# Altium PCB MAGIsCM0Core.PcbDoc
Units mil, origin at the board's own origin, x right, y up, seen from the top; angles counter-clockwise.
Board outline 6000 x 4000 mil, 2 copper layers (Top Layer, Bottom Layer); 12 components, 22 nets, 93 pads, 13 vias.
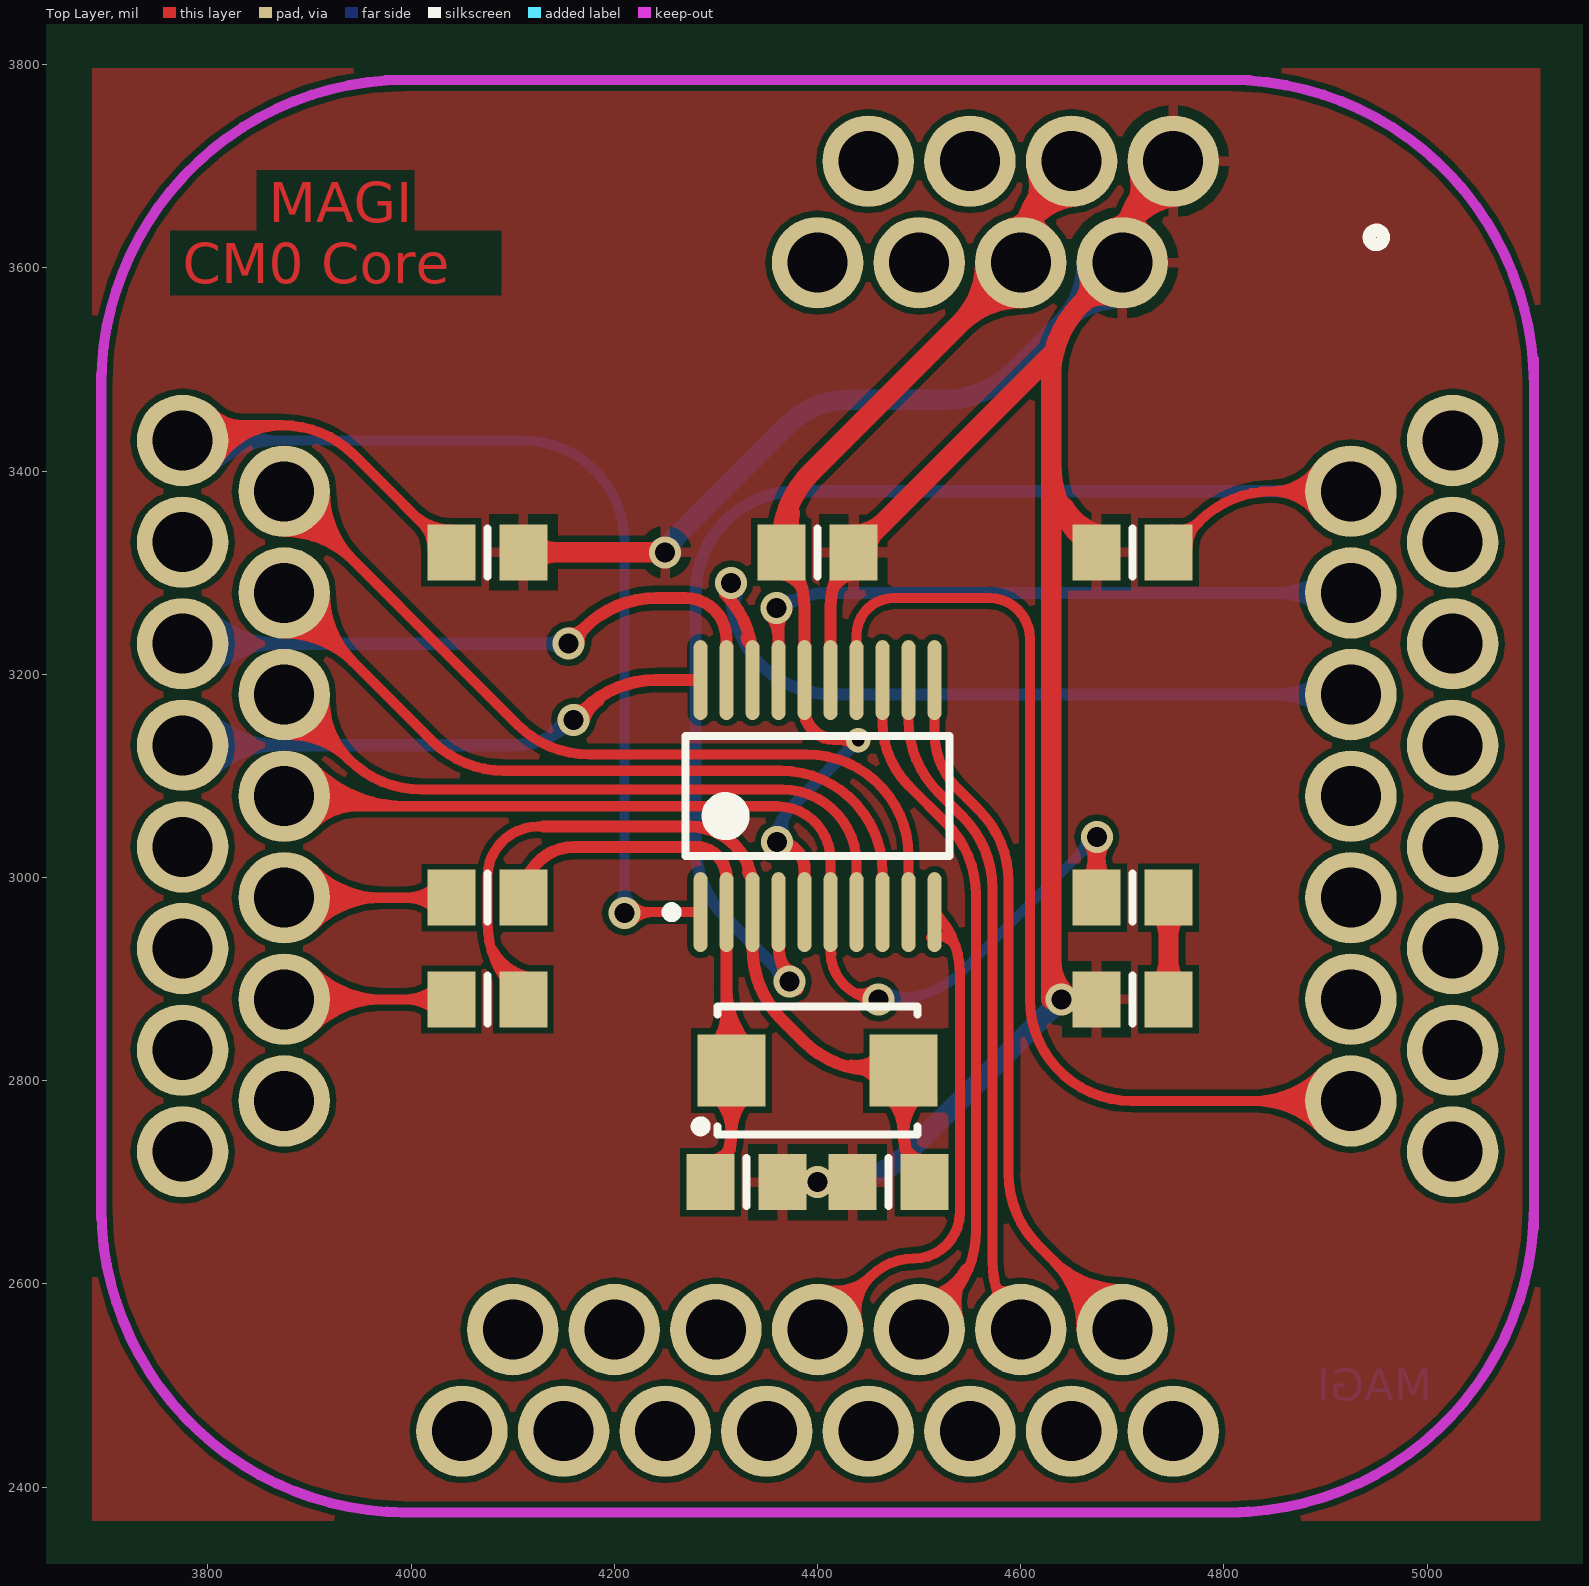
[diagram p0: Top Layer view]
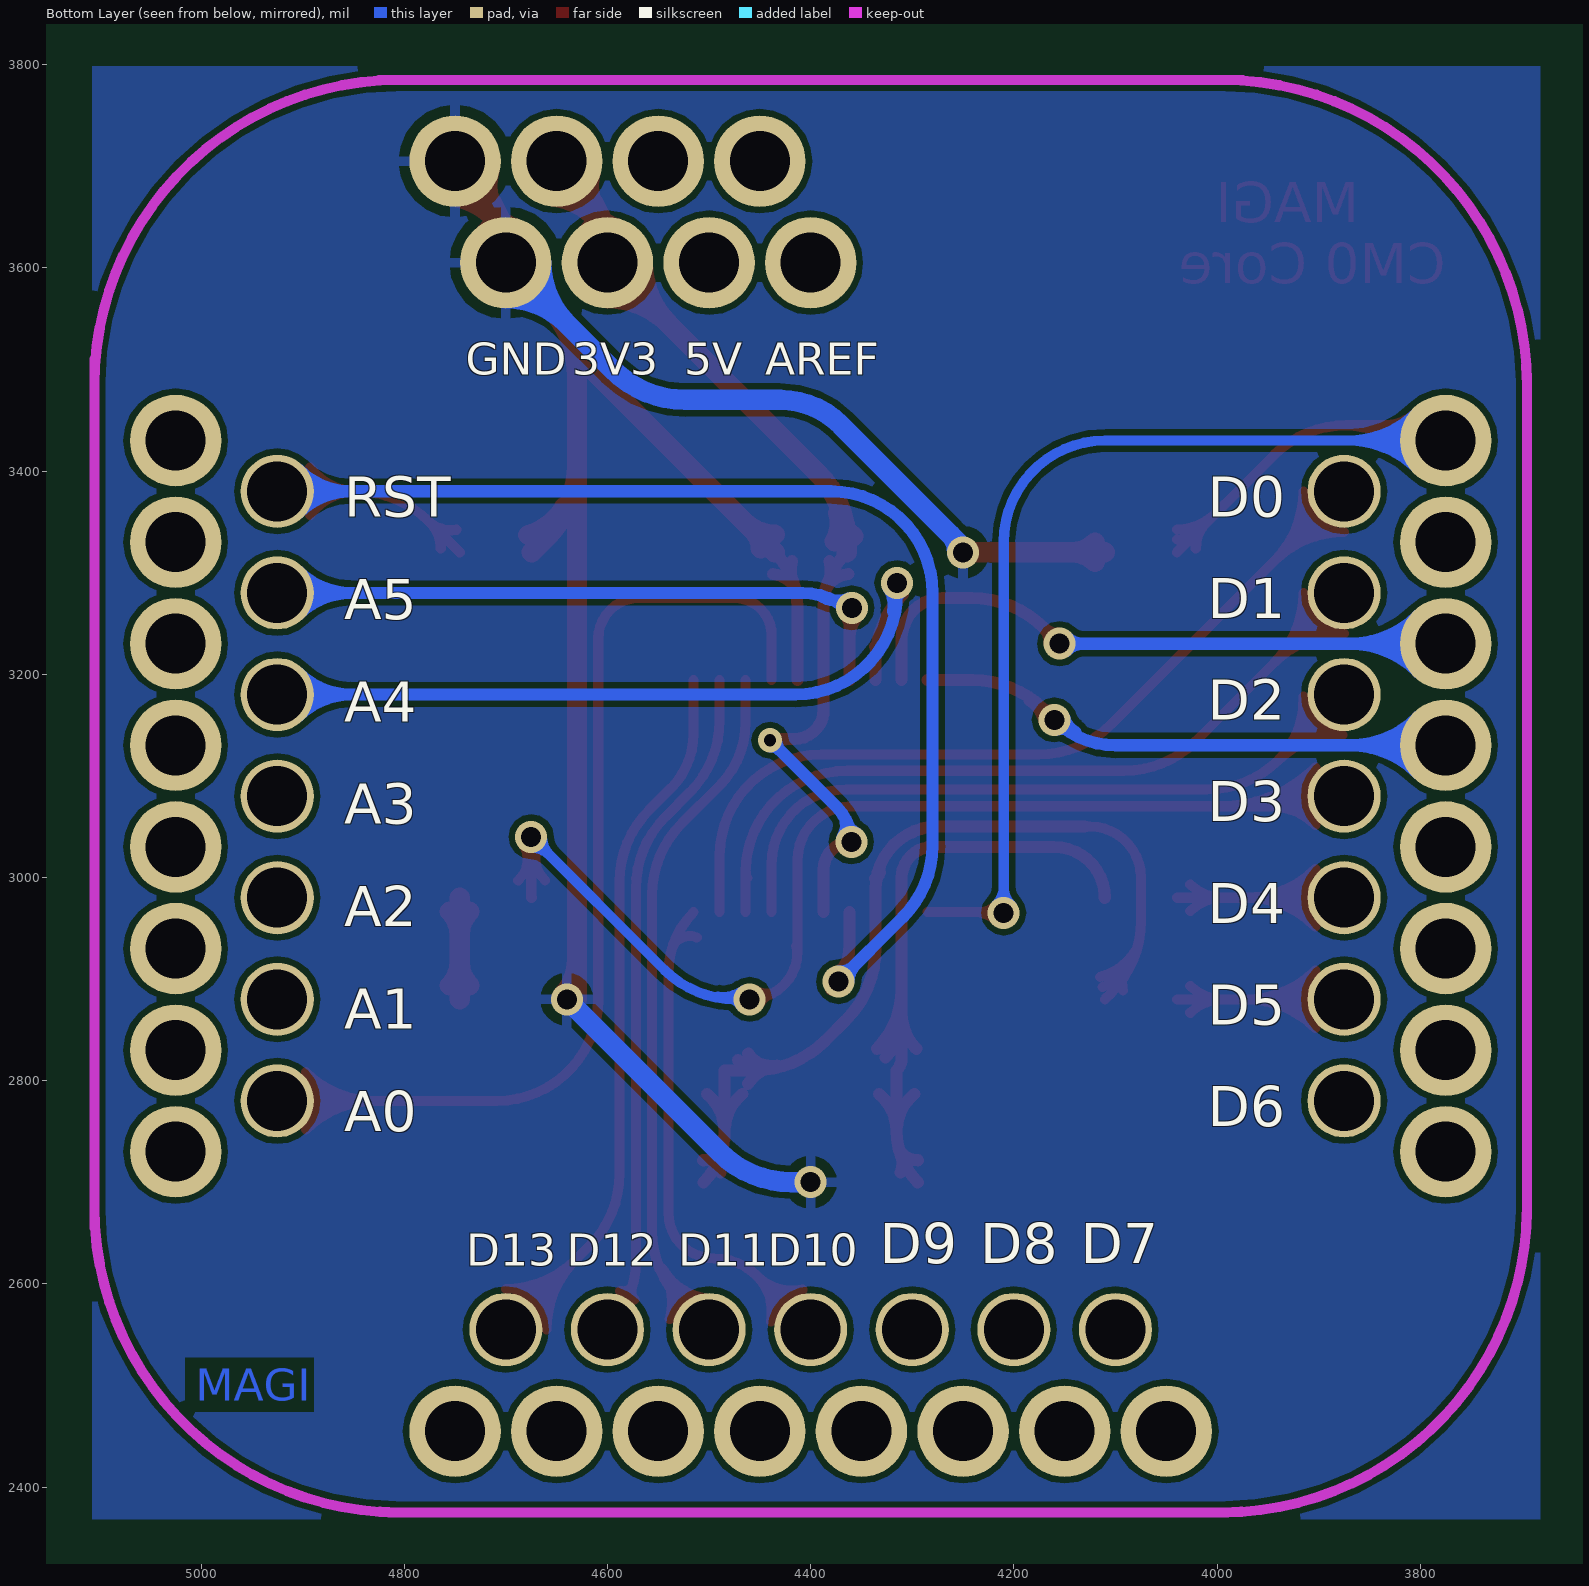
[diagram p1: Bottom Layer view, seen from below]

## Layer stack, top to bottom
Top Solder: solder mask 0.4, Solder Resist, Dk 3.5
Top Layer: signal copper 1.4
Dielectric 1: dielectric 12.6, FR-4, Dk 4.8
Bottom Layer: signal copper 1.4
Bottom Solder: solder mask 0.4, Solder Resist, Dk 3.5

## Board outline
1000,1000 7000,1000 7000,5000 1000,5000

## Design rules (kind name [scope] priority, off if disabled: settings)
Clearance [All] p1: gap=6
PolygonConnect [All] p1: connectstyle=Relief reliefconductorwidth=10 reliefentries=4 polygonreliefangle="90 Angle" airgapwidth=10
RoutingVias [All] p1: holewidth=28 width=50 viastyle="Through Hole" minholewidth=12 minwidth=24 maxholewidth=280 maxwidth=500
SolderMaskExpansion [All] p1: expansion=4
Width [All] p1: maxlimit=100 minlimit=10 preferedwidth=30
29 further rules are at their usual default settings.

## Classes and differential pairs
component class MAGI'sM0Core: C1 C2 C3 LED3 R1 R2 R8 U1 X1

## Components (designator, comment, footprint, x,y, rotation, side; value= is the part's Value field where it differs from the comment)
C1 "10uf" 6-0805_n 4400,3320 r0 top
C2 "15PF" 6-0805_n 4330,2700 r180 top
C3 "15PF" 6-0805_n 4470,2700 r0 top
C4 "100nF" 6-0805_n 4710,3320 r0 top
J1 "MAGIsBoard-2x" MAGIsBoard-2x 4400,3080 r0 top
LED3 "LED_3" 6-0805_N 4710,2880 r180 top
R1 "10K" 6-0805_n 4075,2980 r180 top
R2 "10K" 6-0805_n 4075,2880 r180 top
R3 "10K" 6-0805_n 4075,3320 r180 top
R8 "RES1_1" 6-0805_N 4710,2980 r180 top
U1 "STM32F030F4" STM32F030 4400,3080 r90 top
X1 "8M" 5032 4410,2810 r270 top

## Footprints (in the part's own frame and the unit in brackets; to place one, negate y for a bottom-side part, rotate by r counter-clockwise, add the part's x,y. Pads: shape width x height; smd on the part's side, far side on the other; paste and mask are expansions set on the pad)
6-0805_n [mm] "Chip Resistor, Body 2.0x1.2mm, IPC Medium Density"
  rect 1.2x1.4 smd: 1(-0.9,0) 2(0.9,0)
  silkscreen extent 0,-0.6 0,0.6, body extent -1.07,-0.7 1.07,0.7, height 0.7
6-0805_N [mm] "Chip Resistor, Body 2.0x1.2mm, IPC Medium Density"
  rect 1.2x1.4 smd: 1(-0.9,0) 2(0.9,0)
  silkscreen extent 0,-0.6 0,0.6, body extent -1.07,-0.7 1.07,0.7, height 0.7
5032 [mm]
  rect 1.8x1.7 smd: 1(0,-2.404) 2(0,1.896)
  silkscreen extent -1.6,-3.3 1.6,2.25
MAGIsBoard-2x [mil]
  round 90 hole 59.06: 1(300,525) 1(350,625) 2(200,525) 2(250,625) 3(100,525) 3(150,625) 4(0,525) 4(50,625) 29(-625,350) 30(-625,250) 31(-625,150) 32(-625,50) 33(-625,-50) 34(-625,-150) 35(-625,-250) 36(-625,-350) 37(-350,-625) 38(-250,-625) 39(-150,-625) 40(-50,-625) 41(50,-625) 42(150,-625) 43(250,-625) 44(350,-625) 45(625,-350) 46(625,-250) 47(625,-150) 48(625,-50) 49(625,50) 50(625,150) 51(625,250) 52(625,350)
  round 90 / inner round 90 / far side round 72 hole 59.06: 8(-525,300) 9(-525,200) 10(-525,100) 11(-525,0) 12(-525,-100) 13(-525,-200) 14(-525,-300) 15(-300,-525) 16(-200,-525) 17(-100,-525) 18(0,-525) 19(100,-525) 20(200,-525) 21(300,-525) 22(525,-300) 23(525,-200) 24(525,-100) 25(525,0) 26(525,100) 27(525,200) 28(525,300)
  Keep-Out Layer lines w10: -705,-415 -705,415 ; -705,-405 ccw(c-405,-405) -405,-705 ; -705,405 cw(c-405,405) -405,705 ; -425,705 425,705 ; -410,-705 415,-705 ; 405,-705 ccw(c405,-405) 705,-405 ; 405,705 cw(c405,405) 705,405 ; 705,-425 705,430
  silkscreen extent 543,543 557,557
STM32F030 [mm] "TSOP, 20-Leads, Body 6.50x4.40mm, Pitch 0.65mm, IPC Low Density"
  oval 2x0.35 smd: 1(-2.9,2.925) 2(-2.9,2.275) 3(-2.9,1.625) 4(-2.9,0.975) 5(-2.9,0.325) 6(-2.9,-0.325) 7(-2.9,-0.975) 8(-2.9,-1.625) 9(-2.9,-2.275) 10(-2.9,-2.925) 11(2.9,-2.925) 12(2.9,-2.275) 13(2.9,-1.625) 14(2.9,-0.975) 15(2.9,-0.325) 16(2.9,0.325) 17(2.9,0.975) 18(2.9,1.625) 19(2.9,2.275) 20(2.9,2.925)
  silkscreen extent -3.02,-3.3 1.5,3.77, body extent -2.25,-3.3 2.25,3.3, height 1.2

## Part data
C1: library part "CAPACITOR POL", "Capacitor"
C2 C3 C4: library part CAP
R1 R2 R3: library part RES
X1: library part CRYSTAL

## Via types
v1: diameter 31.5, hole 19.68, Top Layer to Bottom Layer, 12 vias
v2: diameter 24, hole 12, Top Layer to Bottom Layer, 1 vias

## Nets (pads, with @x,y where several pads share a name; then routed paths per layer and width w, separated by ;. In a path a pad name is that pad's centre, name@x,y a point inside that pad or via, vN(x,y) a via of type N, cw(c..) or ccw(c..) an arc to the next point about the centre after c; other vN are vias at no path point)
3.3V: C1.1 J1.2 U1.5 U1.16 | length 1466.8
  Top Layer w12: v1(4360,3035) cw(c4360,3007.8) 4387.2,3007.8 U1.5 ; C1.1@4362.99,3298.51 cw(c4360.45,3270.11) 4385.14,3284.37 cw(c4416.04,3302.21) C1.1@4381.58,3311.48 ; C1.1 cw(c4309.91,3265.35) 4387.2,3265.35 U1.16 4387.2,3165.1 ccw(c4416,3165.1) 4416,3136.31 4438.69,3136.31 cw(c4438.69,3135) v2(4440,3135) ; 4422.36,3136.31 cw(c4422.36,3117.36) v2@4435.76,3130.76
  Top Layer w20: C1.1@4357.76,3335.73 ccw(c4343.17,3360.99) 4371.35,3353.44 ; C1.1 4364.57,3328.15 cw(c4464.57,3328.15) 4393.86,3398.86 4600,3605 4600,3613.58 cw(c4700,3613.58) 4629.29,3684.29 J1.2@4650,3705 ; 4372.71,3358.52 ccw(c4408.07,3349.05) C1.1@4376.36,3330.75 ; J1.2@4565,3605 cw(c4480.5,3605) 4540.25,3545.25 cw(c4600,3485.5) J1.2@4600,3570 ; J1.2@4591.24,3638.89 ccw(c4583.84,3667.52) 4612.4,3659.86 ccw(c4637.56,3653.12) J1.2@4621.53,3632.59 ; J1.2@4601.22,3635.67 cw(c4661.83,3600.68) J1.2@4653.95,3670.22 ; 4610.34,3651.46 ccw(c4559.57,3680.77) J1.2@4616.19,3695.94 ; 4621.05,3670.02 cw(c4656.28,3649.68) J1.2@4651.69,3690.1
  Bottom Layer w12: v1@4355.13,3043.44 ccw(c4343.36,3063.82) 4366.09,3057.73 ccw(c4388.82,3051.64) v1@4368.44,3039.87 ; v1(4360,3035) cw(c4408.28,3035) 4374.14,3069.14 v2(4440,3135) ; v2@4434,3135 cw(c4419.51,3135) 4429.76,3124.76 cw(c4440,3114.51) v2@4440,3129
A0: J1.22 U1.14 | length 1327.9
  Top Layer w10: U1.14 4438.39,3238.39 cw(c4475,3238.39) 4475,3275 4569,3275 cw(c4569,3235) 4609,3235 4609,2880 ccw(c4709,2880) 4709,2780 J1.22 ; J1.22@4896.72,2751.72 ccw(c4828.43,2683.43) 4828.43,2780 ccw(c4828.43,2876.57) J1.22@4896.72,2808.28 ; J1.22@4903.79,2758.79 ccw(c4852.57,2707.57) 4852.57,2780 ccw(c4852.57,2852.43) J1.22@4903.79,2801.21 ; J1.22@4910.86,2765.86 ccw(c4876.72,2731.72) 4876.72,2780 ccw(c4876.72,2828.28) J1.22@4910.86,2794.14
A4: J1.26 U1.18 | length 998.8
  Top Layer w12: v1@4308.96,3278.96 cw(c4243.62,3213.62) 4336.02,3213.62 U1.18 ; 4330.1,3235.72 ccw(c4343.3,3239.26) U1.18@4336.47,3227.42
  Bottom Layer w12: v1@4309.7,3281.82 cw(c4300.77,3268.05) 4316.82,3271.48 ; v1(4315,3290) 4315,3280 ccw(c4415,3280) 4415,3180 J1.26 ; 4318.92,3261.62 cw(c4348.91,3268.02) v1@4323.18,3284.7 ; J1.26@4903.79,3158.79 ccw(c4852.57,3107.57) 4852.57,3180 ccw(c4852.57,3252.43) J1.26@4903.79,3201.21 ; J1.26@4912.27,3167.27 ccw(c4881.54,3136.54) 4881.54,3180 ccw(c4881.54,3223.46) J1.26@4912.27,3192.73
A5: J1.27 U1.17 | length 893.6
  Top Layer w12: v1@4352.51,3258.46 cw(c4330.55,3236.49) 4361.61,3236.49 ; v1(4359.41,3265.35) 4359.65,3265.35 4360,3265 4360,3260 cw(c4360,3258.39) 4361.61,3258.39 U1.17 ; 4361.61,3247.14 cw(c4377.61,3247.14) v1@4366.3,3258.46
  Bottom Layer w12: v1(4359.41,3265.35) 4359.65,3265.35 4360,3265 4360,3260 cw(c4408.28,3211.72) 4408.28,3280 J1.27 ; v1@4363,3274.41 ccw(c4373.67,3301.32) 4388.15,3276.25 ; J1.27@4903.79,3258.79 ccw(c4852.57,3207.57) 4852.57,3280 ccw(c4852.57,3352.43) J1.27@4903.79,3301.21 ; J1.27@4912.27,3267.27 ccw(c4881.54,3236.54) 4881.54,3280 ccw(c4881.54,3323.46) J1.27@4912.27,3292.73
BOOT0: J1.29 R3.2 U1.1 | length 2041.1
  Top Layer w10: J1.29 cw(c3811.21,3393.79) 3811.21,3445 3873.15,3445 ; J1.29@3783.53,3424.78 cw(c3819.61,3402.7) 3819.61,3445 ; J1.29@3792.06,3419.56 cw(c3837.45,3391.78) 3837.45,3445 ; J1.29@3800.59,3414.34 cw(c3855.3,3380.86) 3855.3,3445 ; J1.29@3803.28,3458.28 ccw(c3835.36,3490.36) 3835.36,3445 ; J1.29@3809.12,3409.12 cw(c3873.14,3369.94) 3873.14,3445 ; 4001.06,3358.51 ccw(c4039.57,3397.02) R3.2@4039.57,3342.56 ; 4010.56,3349.01 cw(c3985.49,3323.94) R3.2@4020.94,3323.94 ; R3.2@4018.13,3341.44 ccw(c4039.57,3362.88) R3.2@4039.57,3332.56 ; R3.2 3943.86,3415.71 ccw(c3873.15,3345) 3873.15,3445 ; v1(4210,2965) cw(c4210.83,2965) 4210.83,2965.83 U1.1 ; v1@4217.6,2957.4 cw(c4237.94,2937.06) 4237.94,2965.83 ; v1@4217.6,2972.6 ccw(c4233.95,2988.95) 4233.95,2965.83
  Bottom Layer w10: J1.29 4110,3430 cw(c4110,3330) 4210,3330 v1(4210,2965) ; J1.29@3789.14,3415.86 cw(c3823.28,3381.72) 3823.28,3430 cw(c3823.28,3478.28) J1.29@3789.14,3444.14 ; J1.29@3796.21,3408.79 cw(c3847.43,3357.57) 3847.43,3430 cw(c3847.43,3502.43) J1.29@3796.21,3451.21 ; J1.29@3803.28,3401.72 cw(c3871.57,3333.43) 3871.57,3430 cw(c3871.57,3526.57) J1.29@3803.28,3458.28 ; v1@4202.4,2972.6 ccw(c4184.05,2990.95) 4210,2990.95 ccw(c4235.95,2990.95) v1@4217.6,2972.6
D0: J1.8 U1.9 | length 1171.1
  Top Layer w10: J1.8@3875,3340 cw(c3875,3243.43) 3943.28,3311.72 cw(c4011.57,3380) J1.8@3915,3380 ; J1.8@3875,3350 cw(c3875,3277.57) 3926.21,3328.79 cw(c3977.43,3380) J1.8@3905,3380 ; J1.8@3875,3360 cw(c3875,3311.72) 3909.14,3345.86 cw(c3943.28,3380) J1.8@3895,3380 ; J1.8 4104.71,3150.29 ccw(c4175.42,3221) 4175.42,3121 4389.57,3121 cw(c4389.57,3021) 4489.57,3021 U1.9
D1: J1.9 U1.8 | length 1101
  Top Layer w10: J1.9@3875,3240 cw(c3875,3143.43) 3943.28,3211.72 cw(c4011.57,3280) J1.9@3915,3280 ; J1.9@3875,3250 cw(c3875,3177.57) 3926.21,3228.79 cw(c3977.43,3280) J1.9@3905,3280 ; J1.9@3875,3260 cw(c3875,3211.72) 3909.14,3245.86 cw(c3943.28,3280) J1.9@3895,3280 ; J1.9 4020.71,3134.29 ccw(c4091.42,3205) 4091.42,3105 4363.98,3105 cw(c4363.98,3005) 4463.98,3005 U1.8 ; U1.8@4462.45,2999.43 ccw(c4456,3004.17) 4463.92,3005.38
D2: J1.10 U1.7 | length 996.5
  Top Layer w10: J1.10 3939.12,3115.88 ; J1.10@3875.91,3160.02 cw(c3877.8,3118.68) 3907.06,3147.94 cw(c3936.32,3177.2) J1.10@3894.98,3179.09 ; J1.10@3876.37,3150.03 cw(c3879.19,3088.02) 3923.09,3131.91 cw(c3966.98,3175.81) J1.10@3904.97,3178.63 ; J1.10@3876.82,3140.04 cw(c3880.59,3057.36) 3939.11,3115.89 ; J1.10@3914.96,3178.18 ccw(c3997.64,3174.41) 3939.11,3115.89 ; U1.7 4438.39,3013.21 ccw(c4365,3013.21) 4365,3086.59 4009.83,3086.59 cw(c4009.83,3186.59) 3939.12,3115.88
D3: J1.11 R8.2 U1.6 | length 1761.7
  Top Layer w10: J1.11 ccw(c3885,3080) 3885,3070 4360,3070 cw(c4360,3017.2) 4412.8,3017.2 U1.6 4412.8,2927.2 ccw(c4460,2927.2) v1(4460,2880) ; J1.11@3882.07,3087.07 ccw(c3923.28,3128.28) 3923.28,3070 ccw(c3923.28,3031.72) J1.11@3896.21,3058.79 ; J1.11@3889.14,3094.14 ccw(c3947.43,3152.43) 3947.43,3070 ccw(c3947.43,3007.57) J1.11@3903.28,3051.72 ; J1.11@3896.21,3101.21 ccw(c3971.57,3176.57) 3971.57,3070 ; J1.11@3903.28,3108.28 ccw(c3995.71,3200.71) 3995.71,3070 ; 4413.43,2924.82 cw(c4423.08,2927.41) U1.6@4414.43,2932.4 ; v1@4450.47,2875.04 ccw(c4430.6,2864.69) 4436.4,2886.32 ccw(c4442.2,2907.96) v1@4454.23,2889.07 ; R8.2@4661.4,2997.1 ccw(c4628.56,3029.94) v1@4675,3029.94 ; v1@4666.1,3033.98 cw(c4642.95,3018.31) 4669.95,3011.08 ; v1@4667.4,3032.4 cw(c4649.05,3014.05) 4675,3014.05 cw(c4700.95,3014.05) v1@4682.6,3032.4 ; v1@4669.63,3030.69 cw(c4662.02,3017.52) 4676.71,3021.46 ; 4672.43,3020.33 cw(c4688.9,3015.92) v1@4680.37,3030.69 ; R8.2 4675,2980 v1(4675,3040) ; v1@4675,3027.85 ccw(c4718.48,3027.85) R8.2@4687.73,2997.1 ; 4679.41,3011.37 cw(c4704.57,3018.11) v1@4683.64,3033.6
  Bottom Layer w10: v1(4460,2880) 4473.58,2880 ccw(c4473.58,2980) 4544.29,2909.29 v1(4675,3040) ; v1@4466.28,2888.72 ccw(c4485.79,2915.84) 4491.17,2882.87 ; v1@4468.72,2873.72 cw(c4483.73,2862.92) 4480.76,2881.17 ; v1@4664.25,3040 cw(c4638.3,3040) 4656.65,3021.65 cw(c4675,3003.3) v1@4675,3029.25
D4: J1.12 R1.2 | length 576.5
  Top Layer w10: J1.12 R1.2 ; J1.12@3889.14,2965.86 cw(c3923.28,2931.72) 3923.28,2980 cw(c3923.28,3028.28) J1.12@3889.14,2994.14 ; J1.12@3896.21,2958.79 cw(c3947.43,2907.57) 3947.43,2980 cw(c3947.43,3052.43) J1.12@3896.21,3001.21 ; J1.12@3903.28,2951.72 cw(c3971.57,2883.43) 3971.57,2980 cw(c3971.57,3076.57) J1.12@3903.28,3008.28 ; R1.2@4026.4,2966.83 ccw(c3994.61,2935.04) 3994.61,2980 ccw(c3994.61,3024.96) R1.2@4026.4,2993.17
D5: J1.13 R2.2 | length 576.5
  Top Layer w10: J1.13 R2.2 ; J1.13@3889.14,2865.86 cw(c3923.28,2831.72) 3923.28,2880 cw(c3923.28,2928.28) J1.13@3889.14,2894.14 ; J1.13@3896.21,2858.79 cw(c3947.43,2807.57) 3947.43,2880 cw(c3947.43,2952.43) J1.13@3896.21,2901.21 ; J1.13@3903.28,2851.72 cw(c3971.57,2783.43) 3971.57,2880 cw(c3971.57,2976.57) J1.13@3903.28,2908.28 ; R2.2@4026.4,2866.83 ccw(c3994.61,2835.04) 3994.61,2880 ccw(c3994.61,2924.96) R2.2@4026.4,2893.17
GND: C1.2 C2.1 C3.1 C4.1 J1.1 LED3.2 R3.1 U1.15 | length 3061.7
  Top Layer w12: U1.15 4412.8,3265.35 cw(c4490.09,3265.35) C1.2 ; C1.2@4418.42,3311.48 cw(c4383.96,3302.21) 4414.86,3284.37 cw(c4439.55,3270.11) C1.2@4437.01,3298.51
  Top Layer w20: R3.1 v1(4250,3320) ; R3.1@4120.07,3310.37 cw(c4143.32,3287.11) 4143.32,3320 cw(c4143.32,3352.89) R3.1@4120.07,3329.63 ; C1.2 4632.89,3517.46 ; C1.2@4435.43,3337.56 ccw(c4435.43,3379.95) 4465.41,3349.98 ; C1.2@4449.06,3323.94 cw(c4472.44,3323.94) C1.2@4455.9,3340.47 ; v1@4630,2880 4630,3405.99 ; 4630,2918.02 ccw(c4678.02,2918.02) v1@4644.06,2884.06 ; 4642.45,3364.44 ccw(c4693.29,3393.79) C4.1@4678.09,3337.09 ; J1.1@4666.64,3594.42 cw(c4638.18,3585.4) 4659.29,3564.29 ; C4.1 4659.29,3335.28 cw(c4730,3405.99) 4630,3405.99 ; J1.1@4689.42,3571.64 ccw(c4680.4,3543.18) 4659.29,3564.29 ; J1.1@4691.24,3638.89 ccw(c4683.84,3667.52) 4712.4,3659.86 ccw(c4737.56,3653.12) J1.1@4721.53,3632.59 ; J1.1@4701.22,3635.67 cw(c4761.83,3600.68) J1.1@4753.95,3670.22 ; 4710.34,3651.46 ccw(c4659.57,3680.77) J1.1@4716.19,3695.94 ; 4721.05,3670.02 cw(c4756.28,3649.68) J1.1@4751.69,3690.1 ; J1.1@4750,3705 4729.29,3684.29 ccw(c4800,3613.58) 4700,3613.58 4700,3605 4659.29,3564.29 ; 4630,3405.99 4630,3493.58 cw(c4730,3493.58) 4632.89,3517.46 ; 4632.89,3517.46 cw(c4730,3493.58) 4659.29,3564.29
  Bottom Layer w20: v1(4250,3320) cw(c4262.07,3320) 4253.54,3328.54 4370.25,3445.25 cw(c4430,3385.5) 4430,3470 4523.58,3470 ccw(c4523.58,3570) 4594.29,3499.29 J1.1@4700,3605 ; v1@4255.75,3320 cw(c4281.7,3320) 4263.35,3338.35 ; v1(4400,2700) 4418.58,2700 ccw(c4418.58,2800) 4489.29,2729.29 v1(4640,2880) ; J1.1@4665,3605 cw(c4580.5,3605) 4640.25,3545.25 cw(c4700,3485.5) J1.1@4700,3570
MISO: J1.20 U1.12 | length 700.8
  Top Layer w10: U1.12 4489.57,3154.48 ccw(c4589.57,3154.48) 4518.86,3083.77 4542.77,3059.86 cw(c4472.06,2989.15) 4572.06,2989.15 4572.06,2622.46 ccw(c4667.46,2622.46) J1.20 ; J1.20@4573.24,2584.73 ccw(c4566.22,2592.53) 4575.31,2597.77 ccw(c4584.39,2603.01) J1.20@4587.63,2593.04
MOSI: J1.19 U1.13 | length 874.3
  Top Layer w10: U1.13 4463.98,3152.83 ccw(c4552.83,3152.83) 4490,3090 4526.77,3053.23 cw(c4456.06,2982.52) 4556.06,2982.52 4556.06,2652.48 cw(c4456.06,2652.48) 4526.77,2581.77 J1.19 ; J1.19@4497.82,2584.92 ccw(c4493.41,2645.53) 4546.04,2615.15 ; J1.19@4498.55,2574.95 ccw(c4495.07,2622.78) 4536.6,2598.8 ; J1.19@4528.98,2562.76 cw(c4566.63,2572.85) 4532.87,2592.34 ; J1.19@4538.64,2565.35 cw(c4599.61,2581.69) 4544.94,2613.25
NetLED3_1: LED3.1 R8.1 | length 203.3
  Top Layer w20: LED3.1@4735.8,2893.57 ccw(c4712.55,2916.82) 4745.43,2916.82 ccw(c4778.32,2916.82) LED3.1@4755.07,2893.57 ; R8.1@4735.8,2966.43 cw(c4712.55,2943.18) 4745.43,2943.18 cw(c4778.32,2943.18) R8.1@4755.07,2966.43 ; LED3.1 R8.1
OSC_IN: C2.2 R1.1 U1.2 X1.1 | length 829.9
  Top Layer w12: R1.1 cw(c4160.43,2980) 4160.43,3030 4280,3030 cw(c4280,2999.57) 4310.43,2999.57 U1.2 4310.43,2821.88 ccw(c4327.23,2821.88) X1.1 4315.35,2750.18 ; C2.2@4294.33,2721.56 ccw(c4294.03,2744.04) 4313.5,2732.8 ccw(c4337.88,2718.73) C2.2@4311.24,2709.63 ; C2.2 ccw(c4244.38,2750.18) 4315.35,2750.18 ; X1.1@4295.93,2831.39 ccw(c4260.93,2866.39) 4310.43,2866.39 ; X1.1@4297.99,2786.75 cw(c4268.17,2750.19) 4315.35,2750.19 ; 4310.43,2861.18 ccw(c4364.57,2861.18) X1.1@4326.29,2822.9 ; 4310.43,2890.15 ccw(c4393.54,2890.15) X1.1@4334.77,2831.39 ; X1.1@4332.71,2786.75 ccw(c4362.54,2750.19) 4315.35,2750.19
OSC_OUT: C3.2 R2.1 U1.3 X1.2 | length 1169
  Top Layer w10: 4079.21,2929.58 ccw(c4130.62,2959.26) R2.1@4115.25,2901.92 ; 4089.39,2911.95 cw(c4062.93,2896.67) R2.1@4092.45,2888.76 ; 4091.28,2908.67 ccw(c4121.78,2926.28) R2.1@4112.66,2892.27 ; R2.1 4104.29,2886.14 cw(c4175,2956.85) 4075,2956.85 4075,3000 cw(c4125,3000) 4125,3050 4130,3050
  Top Layer w12: 4130,3050 4275,3050 cw(c4275,2988.98) 4336.02,2988.98 U1.3 4336.02,2930.4 ccw(c4436.02,2930.4) 4365.31,2859.69 4385.71,2839.29 ccw(c4456.42,2910) 4456.42,2810 X1.2 4484.65,2750.18 ; 4331.63,3005.39 ccw(c4341.67,3008.08) U1.3@4336.47,2999.08 ; 4433.25,2814.88 ccw(c4438.8,2841.22) X1.2@4461.49,2826.74 ; 4436.47,2814.2 cw(c4428.25,2775.2) X1.2@4461.64,2796.97 ; 4450.22,2811.31 ccw(c4454.43,2831.25) X1.2@4471.61,2820.29 ; X1.2@4467.29,2786.75 cw(c4437.46,2750.19) 4484.65,2750.19 ; C3.2@4488.76,2709.63 ccw(c4462.12,2718.73) 4486.5,2732.8 ccw(c4505.97,2744.04) C3.2@4505.67,2721.56 ; X1.2@4502.01,2786.75 ccw(c4531.83,2750.19) 4484.65,2750.19 ; C3.2 cw(c4555.62,2750.18) 4484.65,2750.18
RST: C4.2 J1.28 U1.4 | length 1899.1
  Top Layer w10: C4.2 4776.14,3350.71 ; C4.2@4748.84,3342.24 ccw(c4754.46,3372.4) 4776.14,3350.71 ; C4.2@4764.06,3323.94 cw(c4799.51,3323.94) 4774.44,3349.01 ; J1.28@4892.55,3356.61 ccw(c4846.86,3323.67) 4846.86,3380 ; J1.28@4892.55,3403.39 cw(c4846.86,3436.33) 4846.86,3380 ; J1.28@4900.66,3362.46 ccw(c4866.39,3337.76) 4866.39,3380 ccw(c4866.39,3422.24) J1.28@4900.66,3397.54 ; J1.28 4846.85,3380 ; 4776.14,3350.71 cw(c4846.85,3280) 4846.85,3380
  Top Layer w12: U1.4 4361.61,2934.39 ccw(c4424.39,2934.39) 4380,2890 v1(4372.5,2897.5) ; v1@4364.26,2902.71 ccw(c4352.78,2909.97) 4364.55,2916.77 ; 4366.42,2913.51 ccw(c4378.69,2920.59) v1@4375.02,2906.92
  Bottom Layer w12: v1@4362.75,2897.5 ccw(c4339.22,2897.5) 4355.86,2914.14 ccw(c4372.5,2930.78) v1@4372.5,2907.25 ; v1(4372.5,2897.5) 4309.29,2960.71 cw(c4380,3031.42) 4280,3031.42 4280,3280 cw(c4380,3280) 4380,3380 J1.28 ; J1.28@4903.79,3358.79 ccw(c4852.57,3307.57) 4852.57,3380 ccw(c4852.57,3452.43) J1.28@4903.79,3401.21 ; J1.28@4912.27,3367.27 ccw(c4881.54,3336.54) 4881.54,3380 ccw(c4881.54,3423.46) J1.28@4912.27,3392.73
SCK: J1.21 U1.11 | length 1045.1
  Top Layer w10: U1.11 4515.16,3141.82 ccw(c4591.74,3141.82) 4537.59,3087.67 4558.77,3066.49 cw(c4488.06,2995.78) 4588.06,2995.78 4588.06,2708.37 ccw(c4688.06,2708.37) 4617.34,2637.66 J1.21 ; J1.21@4660,2555 ccw(c4563.43,2555) 4631.72,2623.28 ccw(c4700,2691.57) J1.21@4700,2595 ; J1.21@4670,2555 ccw(c4597.57,2555) 4648.79,2606.21 ccw(c4700,2657.43) J1.21@4700,2585 ; J1.21@4680,2555 ccw(c4631.72,2555) 4665.86,2589.14 ccw(c4700,2623.28) J1.21@4700,2575
SS: J1.18 U1.10 | length 688.8
  Top Layer w10: J1.18 4452.32,2607.32 ; J1.18@4406.13,2584.37 ccw(c4413.55,2619.93) 4439.24,2594.24 ccw(c4464.93,2568.55) J1.18@4429.37,2561.13 ; J1.18@4408.17,2594.16 ccw(c4418.07,2641.57) 4452.32,2607.32 ; J1.18@4439.16,2563.17 cw(c4486.57,2573.07) 4452.32,2607.32 ; U1.10@4511.9,2940.77 cw(c4519.2,2924.12) 4534.74,2933.56 ; U1.10 cw(c4455.05,2905.72) 4540.06,2905.72 4540.06,2670.06 cw(c4495,2670.06) 4495,2625 ccw(c4495,2564.64) 4452.32,2607.32
SWCLK: J1.32 U1.20 | length 852.7
  Top Layer w12: v1(4160,3155) 4169.88,3164.88 cw(c4240.59,3094.17) 4240.59,3194.17 U1.20 ; v1@4162.14,3164.51 ccw(c4165.01,3177.23) 4171.98,3166.21 ; v1@4169.51,3152.86 cw(c4202.7,3145.37) 4184.52,3174.14
  Bottom Layer w12: J1.32 4099.64,3130 ccw(c4099.64,3215.36) v1(4160,3155) ; J1.32@3794.09,3110.91 cw(c3840.18,3064.82) 3840.18,3130 cw(c3840.18,3195.18) J1.32@3794.09,3149.09 ; J1.32@3802.58,3102.42 cw(c3869.15,3035.85) 3869.15,3130 cw(c3869.15,3224.15) J1.32@3802.58,3157.58 ; v1@4150.58,3157.52 cw(c4127.85,3163.61) 4139.62,3143.23 cw(c4151.39,3122.85) v1@4157.48,3145.58
SWDIO: J1.31 U1.19 | length 934.3
  Top Layer w12: v1(4155,3230) 4170.71,3245.71 ; v1@4155.4,3239.74 ccw(c4156.25,3260.17) 4170.71,3245.71 ; v1@4164.74,3230.4 cw(c4185.17,3231.25) 4170.71,3245.71 ; U1.19 4310.43,3234.57 ccw(c4270,3234.57) 4270,3275 4241.42,3275 ccw(c4241.42,3175) 4170.71,3245.71
  Bottom Layer w12: J1.31 v1(4155,3230) ; J1.31@3794.09,3210.91 cw(c3840.18,3164.82) 3840.18,3230 cw(c3840.18,3295.18) J1.31@3794.09,3249.09 ; J1.31@3802.58,3202.42 cw(c3869.15,3135.85) 3869.15,3230 cw(c3869.15,3324.15) J1.31@3802.58,3257.58 ; v1@4148.11,3223.11 ccw(c4131.47,3206.47) 4131.47,3230 ccw(c4131.47,3253.53) v1@4148.11,3236.89
pads on no net: J1.3 J1.4 J1.14 J1.15 J1.16 J1.17 J1.23 J1.24 J1.25 J1.30 J1.33 J1.34 J1.35 J1.36 J1.37 J1.38 J1.39 J1.40 J1.41 J1.42 J1.43 J1.44 J1.45 J1.46 J1.47 J1.48 J1.49 J1.50 J1.51 J1.52

## Polygon pours and split planes (outlines as drawn)
GND on Top Layer "Bottom Layer-No Net" (solid, pour order 2): 3686.12,3796.66 5111.12,3796.66 5111.12,2366.66 3686.12,2366.66
GND on Bottom Layer "Bottom Layer-No Net" (solid, pour order 4): 3682.07,3798.49 5107.07,3798.49 5107.07,2373.49 5107.07,2368.49 3682.07,2368.49

## Other copper
Top Layer:
  text "MAGI" at 3860,3645 h39.37
  text "CM0 Core" at 3775,3585 h39.37

## Text inside footprints (layer, text, board x,y; h text height)
J1: Bottom Overlay "D0" at 4008.98,3355.08 h39.37; Bottom Overlay "D1" at 4008.98,3255.08 h39.37; Bottom Overlay "D2" at 4008.98,3155.08 h39.37; Bottom Overlay "D3" at 4008.98,3055.08 h39.37; Bottom Overlay "D4" at 4008.98,2955.08 h39.37; Bottom Overlay "D5" at 4008.98,2855.08 h39.37; Bottom Overlay "D6" at 4008.98,2755.08 h39.37; Bottom Overlay "D7" at 4133.98,2620.08 h39.37; Bottom Overlay "D8" at 4232.98,2620.08 h39.37; Bottom Overlay "D9" at 4331.98,2620.08 h39.37; Bottom Overlay "D10" at 4441.97,2617.95 h31.5; Bottom Overlay "D11" at 4530.48,2617.95 h31.5; Bottom Overlay "D12" at 4639.98,2617.95 h31.5; Bottom Overlay "D13" at 4738.98,2617.95 h31.5; Bottom Overlay "A0" at 4858.98,2750.08 h39.37; Bottom Overlay "A1" at 4858.98,2850.91 h39.37; Bottom Overlay "A2" at 4858.98,2951.75 h39.37; Bottom Overlay "A3" at 4858.98,3052.58 h39.37; Bottom Overlay "A4" at 4858.98,3153.41 h39.37; Bottom Overlay "A5" at 4858.98,3254.25 h39.37; Bottom Overlay "RST" at 4858.98,3355.08 h39.37; Bottom Overlay "GND" at 4739.57,3494.84 h31.5; Bottom Overlay "3V3" at 4634.57,3494.84 h31.5; Bottom Overlay "5V" at 4524.57,3494.84 h31.5; Bottom Overlay "AREF" at 4444.57,3494.84 h31.5; Bottom Layer "MAGI" at 5005,2485 h31.5